# EAGLE board V1_SENSOR (EAGLE 6.4)
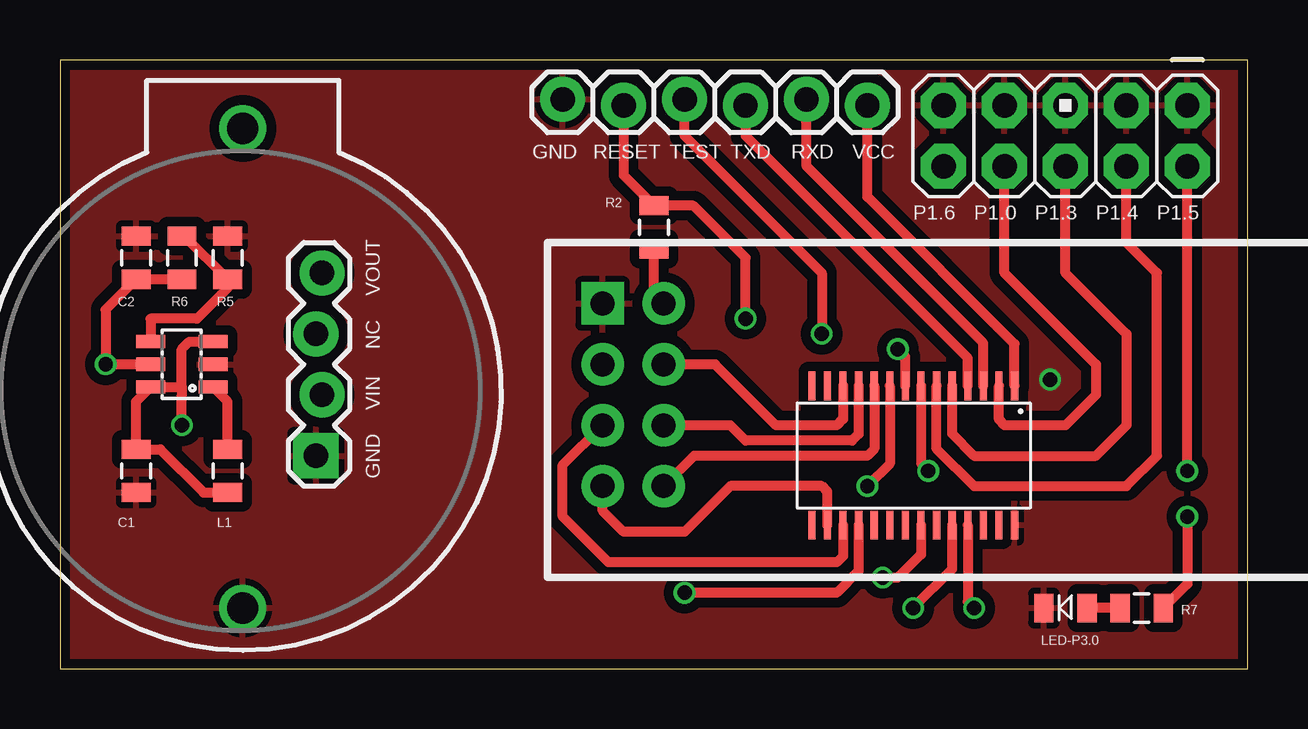
[diagram p0: board, top side]
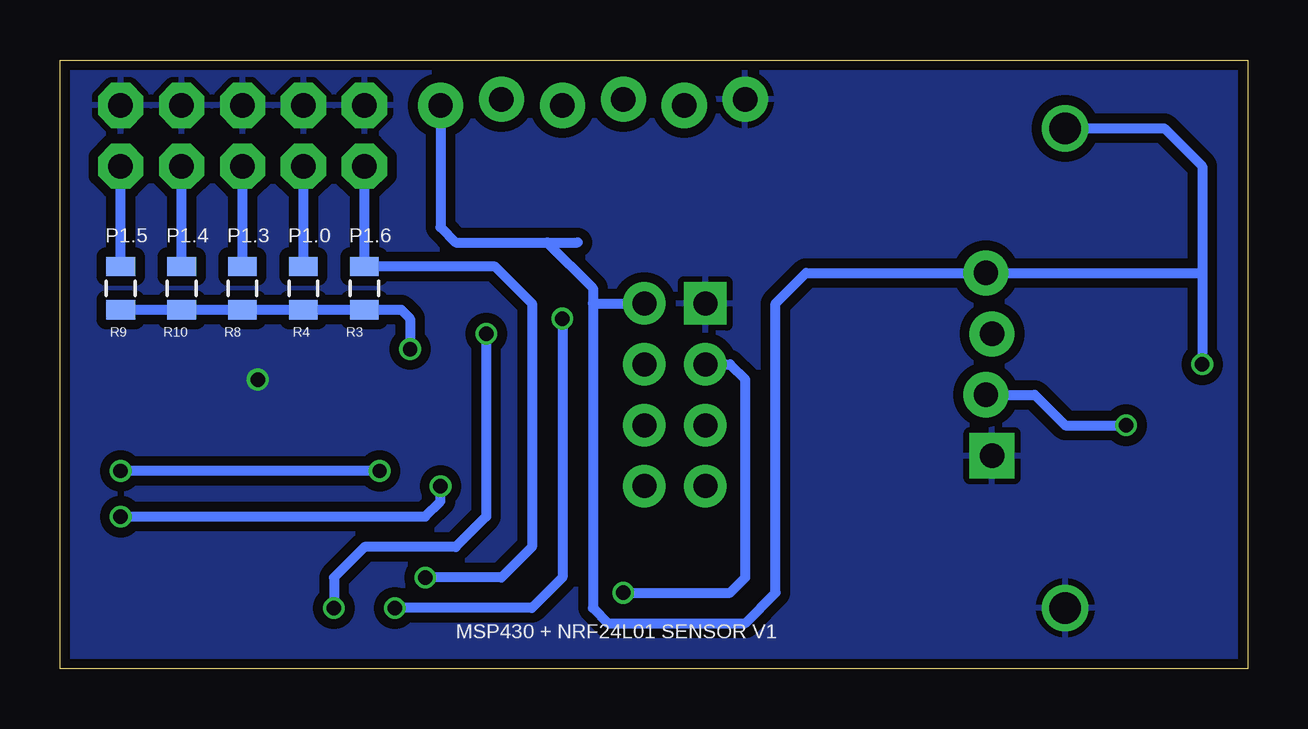
[diagram p1: board, bottom side, seen from below]

Size 49.52 x 25.39 mm. Coordinates in mm from the lower left corner, seen from the top.
Outline: 0,0 49.52,0 49.52,25.39 0,25.39 0,0
Copper layers (1*2*15*16): Top 0.035mm / dielectric 0.2mm / layer 2 0.0175mm / dielectric 1.1mm / layer 15 0.0175mm / dielectric 0.2mm / Bottom 0.035mm
Design rules "SeeedStudio_DRU_no_angle_20130527": minimum track width 6mil, minimum drill 12mil, track to track 6mil, track to pad 6mil, pad to pad 6mil, via to via 6mil, smd to smd 0mil, copper to edge 10mil, drill to drill 10mil, minimum pad ring 6mil, minimum via ring 6mil, stop-mask expansion 2mil, vias tented up to drill 25mil, thermal gap 10mil

## Footprints (pad centres in the part's own frame; a part is rotated, then mirrored left to right if it is on the bottom)
BATTCOM_20MM_PTH = drill 1.3: 1 20,0; 2 0,0
0805 = smd 0.8 x 1.2: 1 -0.9,0; 2 0.9,0
AVR_ICSP = drill 1.016 pad 1.88 octagon: 1 -1.27,5.08; 2 1.27,5.08; 3 -1.27,2.54; 4 1.27,2.54; 5 -1.27,0; 6 1.27,0; 7 -1.27,-2.54; 8 1.27,-2.54; 9 -1.27,-5.08; 10 1.27,-5.08
1X06_LOCK = drill 1.016 pad 1.88: 1 0,0; 2 2.54,-0.254; 3 5.08,0; 4 7.62,-0.254; 5 10.16,0; 6 12.7,-0.254
1X04_LOCK = drill 1.016 pad 1.88 square: 1 0,0.127 | drill 1.016 pad 1.88: 2 2.54,-0.127; 3 5.08,0.127; 4 7.62,-0.127
LED-0805 = smd 0.8 x 1.2: A -0.9,0; C 0.9,0
NRF24L01-4X2 = drill 1 pad 1.778 square: 1 -11.67,3.81 | drill 1 pad 1.778: 2 -9.13,3.81; 3 -11.67,1.27; 4 -9.13,1.27; 5 -11.67,-1.27; 6 -9.13,-1.27; 7 -11.67,-3.81; 8 -9.13,-3.81
SOT23-6L = smd 0.55 x 1.2: 1 -0.95,-1.3; 2 0,-1.3; 3 0.95,-1.3; 4 0.95,1.3; 5 0,1.3; 6 -0.95,1.3
PW28 = smd 0.3 x 1.2: 1 -4.229,-2.908; 2 -3.579,-2.908; 3 -2.929,-2.908; 4 -2.279,-2.908; 5 -1.629,-2.908; 6 -0.979,-2.908; 7 -0.329,-2.908; 8 0.321,-2.908; 9 0.971,-2.908; 10 1.621,-2.908; 11 2.271,-2.908; 12 2.921,-2.908; 13 3.571,-2.908; 14 4.221,-2.908; 15 4.221,2.892; 16 3.571,2.892; 17 2.921,2.892; 18 2.271,2.892; 19 1.621,2.892; 20 0.971,2.892; 21 0.321,2.892; 22 -0.329,2.892; 23 -0.979,2.892; 24 -1.629,2.892; 25 -2.279,2.892; 26 -2.929,2.892; 27 -3.579,2.892; 28 -4.229,2.892

## Placement (x,y rotation side)
BAT1  [BATTCOM_20MM_PTH]  7.62,2.54 90 top
C1  [0805]  3.17,8.26 270 top
C2  [0805]  3.17,17.14 90 top
JP1  M05X2PTH  [AVR_ICSP]  41.91,22.23 270 top
JP2  [1X06_LOCK]  33.66,23.5 180 top
JP5  [1X04_LOCK]  10.79,8.89 90 top
L1  [0805]  6.99,8.26 90 top
LED-P3.0  [LED-0805]  41.91,2.54 180 top
R2  47K  [0805]  24.77,18.41 270 top
R3  47K  [0805]  36.83,15.88 90 bottom
R4  47K  [0805]  39.37,15.88 90 bottom
R5  [0805]  6.99,17.14 270 top
R6  [0805]  5.08,17.14 270 top
R7  220  [0805]  45.09,2.54 180 top
R8  47K  [0805]  41.91,15.88 90 bottom
R9  47K  [0805]  46.99,15.88 90 bottom
R10  47K  [0805]  44.45,15.88 90 bottom
U2  NRF24L01-4X2  [NRF24L01-4X2]  34.29,11.43 0 top
U$2  TLV61220  [SOT23-6L]  5.08,12.7 90 top
U$3  MSP430G2553  [PW28]  35.56,8.89 180 top

## Library data of the parts
BAT1 = SparkFun-Electromechanical
C1 C2 L1 R5 R6 = SparkFun-Passives
JP1 JP2 JP5 = SparkFun-Connectors
LED-P3.0 U$2 = custom
R2-R4 R7-R10 = SparkFun-Resistors
U2 = untitled
U$3 = TI_MSP430_v16

## Nets
GND: BAT1.2 C1.2 C2.2 JP1.1 JP1.3 JP1.5 JP1.7 JP1.9 JP2.6 JP5.1 LED-P3.0.C R5.1 U2.1 U$2.2 U$3.28
N$1: R3.1 R4.1 R8.1 R9.1 R10.1 U$3.8
N$13: L1.2 U$2.1
N$14: R5.2 R6.1 U$2.4
N$15: LED-P3.0.A R7.2
N$17: U2.3 U$3.18
N$18: U2.5 U$3.17
N$19: U2.7 U$3.16
N$20: U2.6 U$3.11
N$21: U2.4 U$3.12
N$22: U2.8 U$3.10
N$23: R7.1 U$3.9
P1.0: JP1.8 R4.2 U$3.2
P1.3: JP1.6 R8.2 U$3.5
P1.4: JP1.4 R10.2 U$3.6
P1.5: JP1.2 R9.2 U$3.7
P1.6: JP1.10 R3.2 U$3.22
RESET: JP2.5 R2.1 U$3.24
RXD: JP2.2 U$3.3
TEST: JP2.4 U$3.25
TXD: JP2.3 U$3.4
VCC: BAT1.1 C2.1 JP2.1 JP5.4 R2.2 R6.2 U2.2 U$2.5 U$3.1
VIN: C1.1 JP5.2 L1.1 U$2.3 U$2.6

## Tracks (layer width: path | path; a pad name or v marks a point on that pad's centre or on a via)
GND  (via drill 0.6)
  other vias: 41.27,12.06
  pour Top (isolate 0.406): 0,25.4 49.53,25.4 49.53,0 0,0
  pour Bottom (isolate 0.406): 0,25.4 49.53,25.4 49.53,0 0,0
N$1  (via drill 0.6)
  Top 0.406: U$3.8 35.24,13.02 v34.92,13.34
  Bottom 0.406: R9.1 R10.1 R8.1 R4.1 R3.1 35.3,14.97 34.92,14.61 v34.92,13.34
N$13
  Top 0.406: L1.2 6.99,11.14 U$2.1
N$14
  Top 0.406: U$2.4 3.78,14.61 5.71,14.61 6.99,15.88 R5.2 5.18,18.05 R6.1
N$15
  Top 0.406: R7.2 LED-P3.0.A
N$17  (via drill 0.6)
  Top 0.406: U$3.18 33.29,4.08 32.38,3.17 v26.04,3.17
  Bottom 0.406: v26.04,3.17 21.59,3.17 20.95,3.81 20.95,12.06 21.59,12.7 U2.3
N$18
  Top 0.406: U$3.17 32.64,4.7 32.38,4.45 22.86,4.45 20.95,6.35 20.95,8.49 U2.5
N$19
  Top 0.406: U$3.16 31.99,7.38 31.75,7.62 27.94,7.62 26.04,5.71 23.5,5.71 22.62,6.59 U2.7
N$20
  Top 0.406: U$3.11 33.29,9.79 33.02,9.53 28.57,9.53 27.94,10.16 U2.6
N$21
  Top 0.406: U$3.12 32.64,10.41 32.38,10.16 29.84,10.16 27.3,12.7 U2.4
N$22
  Top 0.406: U$3.10 33.94,9.17 33.66,8.89 26.43,8.89 U2.8
N$23  (via drill 0.6)
  Top 0.406: U$3.9 34.59,8.55 v33.66,7.62 | v46.99,6.35 46.99,3.54 R7.1
  Bottom 0.406: v46.99,6.35 34.29,6.35 33.66,6.99 v33.66,7.62
P1.0
  Top 0.406: U$3.2 39.14,10.39 39.37,10.16 41.91,10.16 43.18,11.43 43.18,12.7 39.37,16.51 JP1.8
  Bottom 0.406: R4.2 JP1.8
P1.3
  Top 0.406: U$3.5 37.19,9.8 38.1,8.89 43.18,8.89 44.45,10.16 44.45,13.97 41.91,16.51 JP1.6
  Bottom 0.406: R8.2 JP1.6
P1.4
  Top 0.406: U$3.6 36.54,9.18 38.1,7.62 44.45,7.62 45.72,8.89 45.72,16.51 44.45,17.78 JP1.4
  Bottom 0.406: R10.2 JP1.4
P1.5  (via drill 0.6)
  Top 0.406: U$3.7 35.89,8.58 v36.2,8.26 | v46.99,8.26 JP1.2
  Bottom 0.406: v36.2,8.26 v46.99,8.26 | R9.2 JP1.2
P1.6  (via drill 0.6)
  Top 0.406: U$3.22 35.89,4.77 34.92,3.81 v34.29,3.81
  Bottom 0.406: v34.29,3.81 31.11,3.81 29.84,5.08 29.84,15.24 31.38,16.77 R3.2 JP1.10
RESET  (via drill 0.6)
  Top 0.406: v35.56,2.54 37.19,4.17 U$3.24 | v28.57,14.61 28.57,17.14 26.41,19.32 R2.1 23.5,20.59 JP2.5
  Bottom 0.406: v28.57,14.61 28.57,3.81 29.84,2.54 v35.56,2.54
RXD
  Top 0.406: U$3.3 38.49,13.58 31.11,20.95 JP2.2
TEST  (via drill 0.6)
  Top 0.406: U$3.25 37.84,2.8 v38.1,2.54 | JP2.4 26.04,22.23 31.75,16.51 v31.75,13.97
  Bottom 0.406: v31.75,13.97 31.75,6.35 33.02,5.08 36.83,5.08 38.1,3.81 v38.1,2.54
TXD
  Top 0.406: U$3.4 37.84,12.96 28.57,22.23 JP2.3
VCC  (via drill 0.6)
  Top 0.406: R6.2 C2.1 1.91,14.97 v1.91,12.7 U$2.5 | U$3.1 39.79,13.55 33.66,19.68 JP2.1 | U2.2 24.77,15.63 R2.2
  Bottom 0.406: JP2.1 33.66,18.41 33.02,17.78 29.21,17.78 | BAT1.1 3.49,22.54 1.91,20.95 1.91,16.51 | 1.91,16.51 v1.91,12.7 | 27.3,15.24 27.3,2.54 26.67,1.91 20.95,1.91 19.68,3.17 19.68,15.24 18.41,16.51 JP5.4 1.91,16.51 | 29.21,17.78 27.94,17.78 | 27.3,15.24 U2.2 | 29.21,17.78 27.3,15.88 27.3,15.24
VIN  (via drill 0.6)
  Top 0.406: L1.1 5.98,7.36 4.18,9.15 C1.1 3.17,11.14 U$2.6 5.08,11.75 | U$2.3 5.39,13.65 5.08,13.34 5.08,11.75 | v5.08,10.16 5.08,11.43 5.08,11.75
  Bottom 0.406: JP5.2 8.89,11.43 7.62,10.16 v5.08,10.16

## Text on the board
tPlace: GND | RESET | TEST | TXD | RXD | VCC | P1.6 | P1.0 | P1.3 | P1.4 | P1.5 | VOUT | NC | VIN | GND
bPlace: P1.6 | P1.0 | P1.3 | P1.4 | P1.5 | MSP430 + NRF24L01 SENSOR V1